# EAGLE board IR sensor and LED PCB (EAGLE 9.7.0)
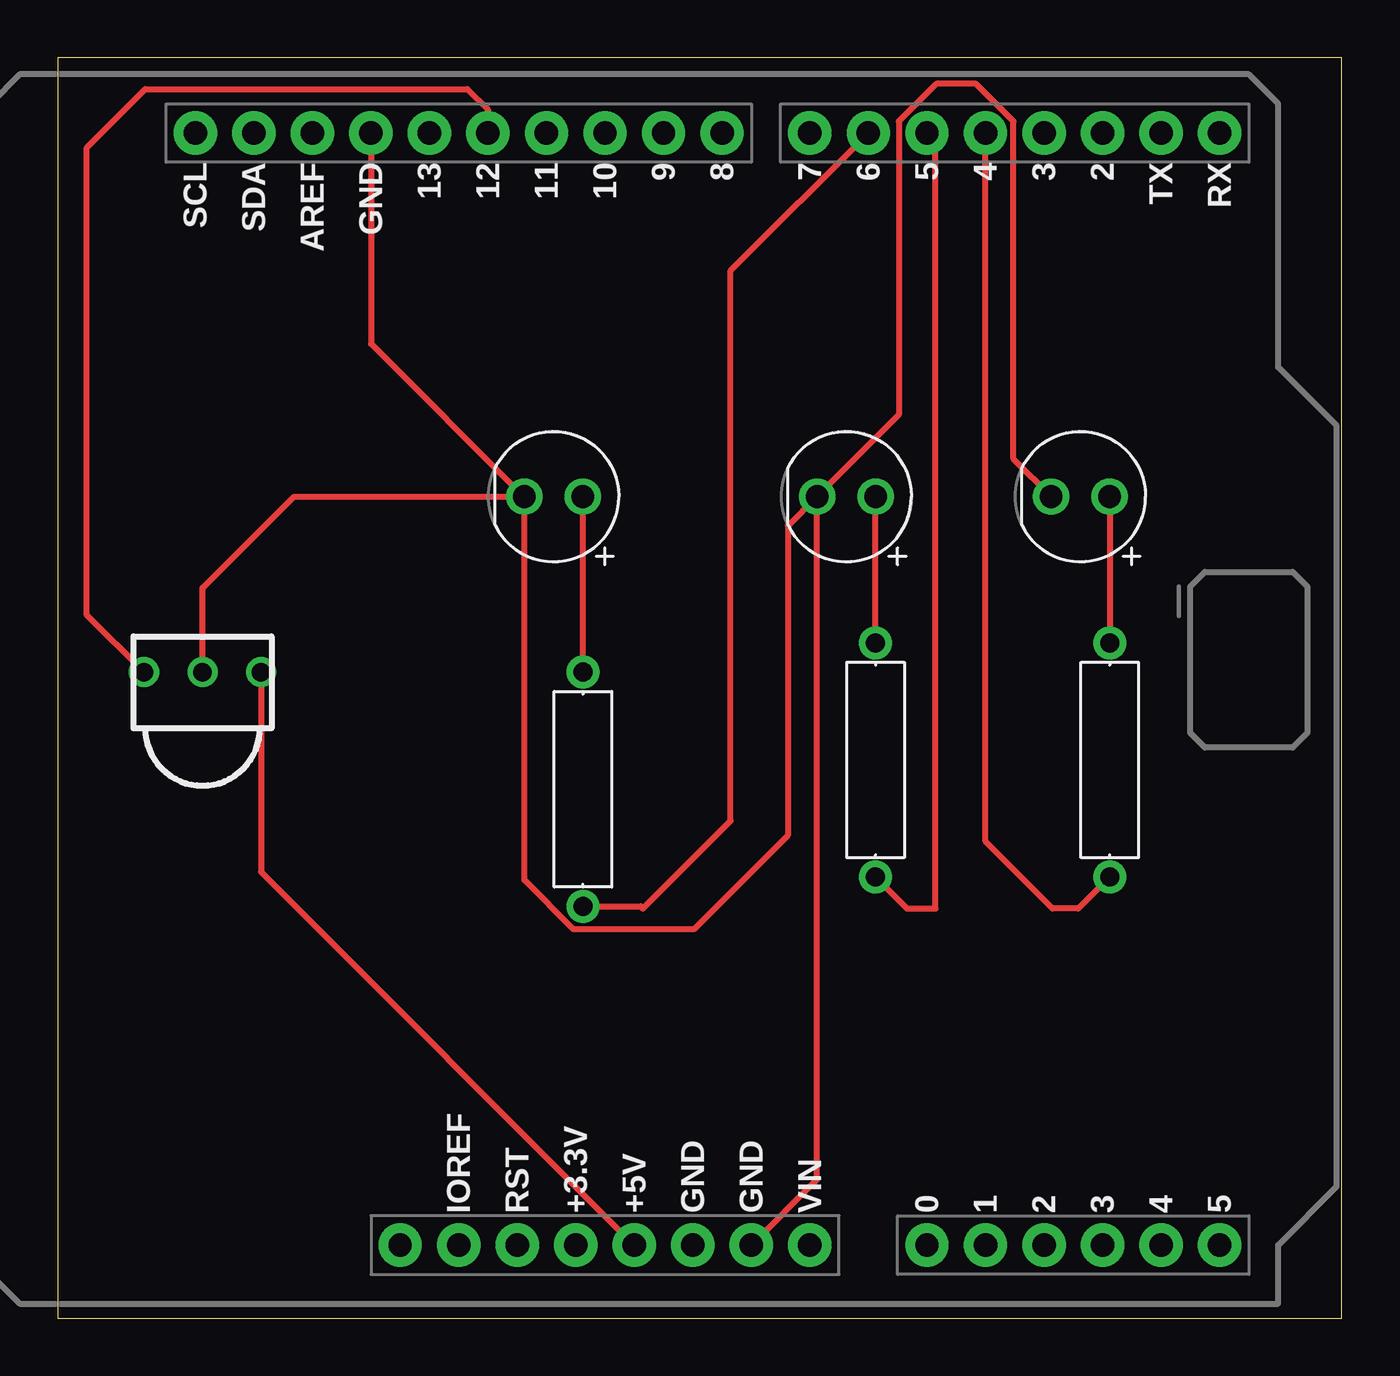
[diagram p0: board, top side]

Size 55.73 x 54.71 mm. Coordinates in mm from the lower left corner, seen from the top.
Outline: 0,0 55.73,0 55.73,54.71 0,54.71 0,0
Copper layers (1*16): Top 0.035mm / dielectric 1.5mm / Bottom 0.035mm
Design rules "default": minimum track width 6mil, minimum drill 0.35mm, track to track 6mil, track to pad 6mil, pad to pad 6mil, via to via 6mil, smd to smd 6mil, copper to edge 40mil, drill to drill 6mil, minimum pad ring 10mil, minimum via ring 8mil, stop-mask expansion 4mil, vias tented up to drill 0mil, thermal gap 10mil

## Footprints (pad centres in the part's own frame; a part is rotated, then mirrored left to right if it is on the bottom)
LEDRD254W60D565H860B = drill 0.981 pad 1.581: 1 -1.27,0; 2 1.27,0
LEDRD254W60D565H860B_G = drill 0.981 pad 1.581: 1 -1.27,0; 2 1.27,0
LEDRD254W60D565H860B_B = drill 0.981 pad 1.581: 1 -1.27,0; 2 1.27,0
RESAD1016W63L850D250B = drill 0.83 pad 1.43: 1 -5.08,0; 2 5.08,0
ARDUINO-UNO-R3-SHIELD = drill 1.016 pad 1.88: 3.3V 24.13,-2.54; 5V 24.13,0; A0 24.13,12.7; A1 24.13,15.24; A2 24.13,17.78; A3 24.13,20.32; A4 24.13,22.86; A5 24.13,25.4; AREF -24.13,-13.97; D2 -24.13,20.32; D3 -24.13,17.78; D4 -24.13,15.24; D5 -24.13,12.7; D6 -24.13,10.16; D7 -24.13,7.62; D8 -24.13,3.81; D9 -24.13,1.27; D10 -24.13,-1.27; D11 -24.13,-3.81; D12 -24.13,-6.35; D13 -24.13,-8.89; GND@0 24.13,2.54; GND@1 24.13,5.08; GND@2 -24.13,-11.43; IOREF 24.13,-7.62; NC 24.13,-10.16; RES 24.13,-5.08; RX -24.13,25.4; SCL -24.13,-19.05; SDA -24.13,-16.51; TX -24.13,22.86; VIN 24.13,7.62
TSOP48 = drill 0.8: 1 -2.54,0; 2 0,0; 3 2.54,0

## Placement (x,y rotation side)
D1  RED  [LEDRD254W60D565H860B]  21.53,35.66 180 top
D2  GREEN  [LEDRD254W60D565H860B_G]  34.23,35.66 180 top
D3  BLUE  [LEDRD254W60D565H860B_B]  44.39,35.66 180 top
R1  220  [RESAD1016W63L850D250B]  22.8,22.96 90 top
R2  220  [RESAD1016W63L850D250B]  35.5,24.23 90 top
R3  220  [RESAD1016W63L850D250B]  45.66,24.23 90 top
U1  ARDUINO-UNO-R3-SHIELD  [ARDUINO-UNO-R3-SHIELD]  25.02,27.3 270 top
U2  IR-RECEIVERTSOP48  [TSOP48]  6.29,28.04 0 top

## Library data of the parts
D1 = Tinkercad; CATEGORY: Opto-Electronic; SUB-CATEGORY: LED; VALUE: LED_RED
D2 = Tinkercad; CATEGORY: Opto-Electronic; SUB-CATEGORY: LED; VALUE: LED_GREEN
D3 = Tinkercad; CATEGORY: Opto-Electronic; SUB-CATEGORY: LED; VALUE: LED_BLUE
R1-R3 U1 U2 = Tinkercad

## Nets
D1_A: D1.1 R1.2
D2_A: D2.1 R2.2
D3_A: D3.1 R3.2
U1_5V: U1.5V U2.3
U1_D4: R3.1 U1.D4
U1_D5: R2.1 U1.D5
U1_D6: R1.1 U1.D6
U1_D12: U1.D12 U2.1
U1_GND: D1.2 D2.2 D3.2 U1.GND@1 U1.GND@2 U2.2

## Tracks (layer width: path | path; a pad name or v marks a point on that pad's centre or on a via)
D1_A
  Top 0.254: R1.2 D1.1
D2_A
  Top 0.254: R2.2 D2.1
D3_A
  Top 0.254: D3.1 R3.2
U1_5V
  Top 0.254: U2.3 8.83,19.37 U1.5V
U1_D4
  Top 0.254: R3.1 44.29,17.78 43.18,17.78 40.27,20.7 U1.D4
U1_D5
  Top 0.254: R2.1 36.87,17.78 38.1,17.78 38.1,51.06 U1.D5
U1_D6
  Top 0.254: R1.1 25.3,17.88 25.4,17.78 29.21,21.59 29.21,45.46 U1.D6
U1_D12
  Top 0.254: U2.1 1.27,30.52 1.27,50.8 3.81,53.34 17.78,53.34 18.67,52.45 U1.D12
U1_GND
  Top 0.254: U2.2 6.29,31.69 10.26,35.66 D1.2 | U1.GND@2 13.59,42.29 20.22,35.66 D1.2 | D2.2 32.96,6.03 U1.GND@1 | D2.2 31.69,34.39 31.69,20.95 27.62,16.88 22.39,16.88 20.26,19.01 D1.2 | D3.2 41.48,37.29 41.48,51.94 39.86,53.56 38.13,53.56 36.51,51.94 36.51,39.2 D2.2